# Altium PCB Synthdude.PcbDoc
Units mil, origin at the board's own origin, x right, y up, seen from the top; angles counter-clockwise.
Board outline 10550 x 5030 mil, 2 copper layers (Top Layer, Bottom Layer); 123 components, 120 nets, 857 pads, 55 vias.
Unrouted connection lines stored in the file: 258.
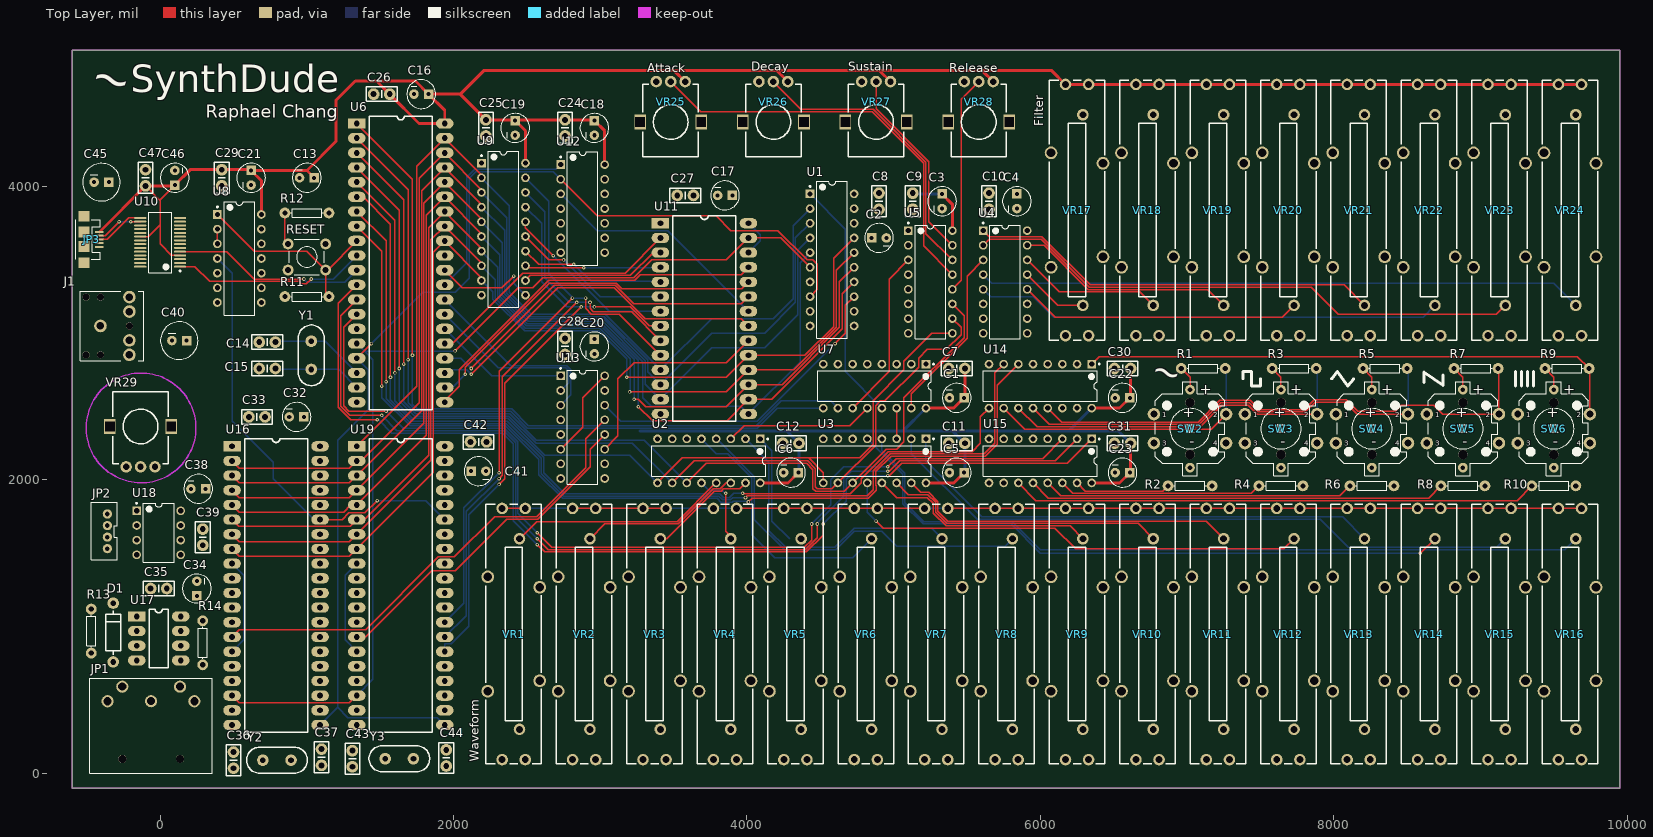
[diagram p0: Top Layer view]
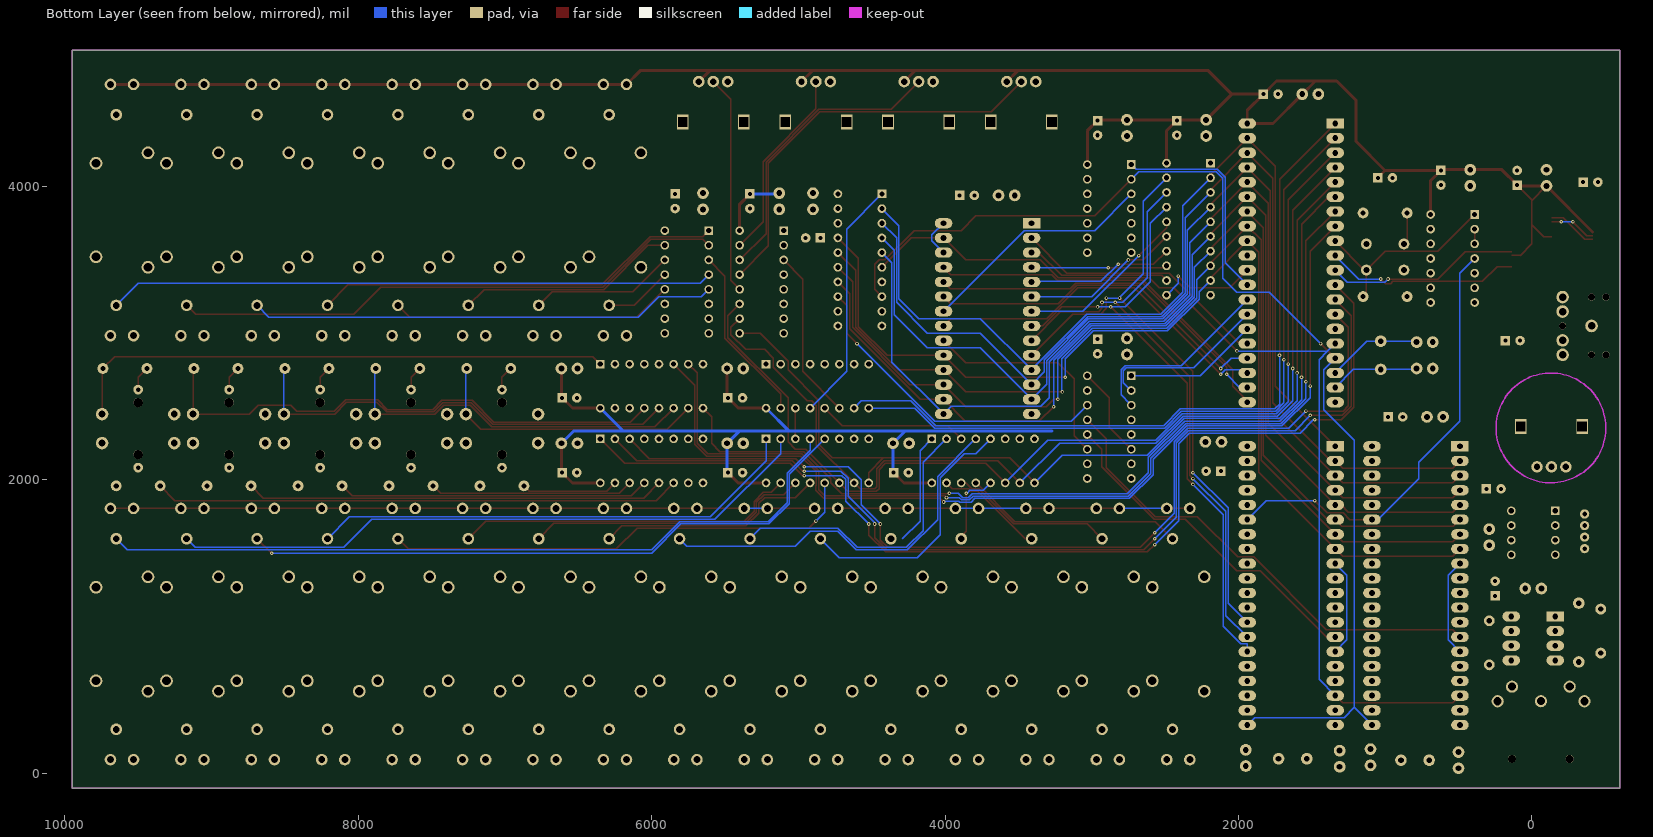
[diagram p1: Bottom Layer view, seen from below]

## Layer stack, top to bottom
Top Solder: solder mask 0.4, Solder Resist, Dk 3.5
Top Layer: signal copper 1.4
Dielectric 1: dielectric 12.6, FR-4, Dk 4.8
Bottom Layer: signal copper 1.4
Bottom Solder: solder mask 0.4, Solder Resist, Dk 3.5

## Board outline
-600,-100 9950,-100 9950,4930 -600,4930

## Design rules (kind name [scope] priority, off if disabled: settings)
Clearance [All] p1: gap=6
PolygonConnect [All] p1: connectstyle=Relief reliefconductorwidth=10 reliefentries=4 polygonreliefangle="90 Angle" airgapwidth=10
RoutingVias [All] p1: holewidth=12 width=24 viastyle="Through Hole" minholewidth=12 minwidth=24 maxholewidth=20 maxwidth=30
SolderMaskExpansion [All] p1: expansion=4
Width [All] p1: maxlimit=30 minlimit=10 preferedwidth=10
30 further rules are at their usual default settings.

## Classes and differential pairs
net class LED[0..4]: LED0 LED1 LED2 LED3 LED4
net class B[0..4]: B0 B1 B2 B3 B4
net class ADC[0..4]: ADC0 ADC1 ADC2 ADC3 ADC4
net class AD[0..7]: AD0 AD1 AD2 AD3 AD4 AD5 AD6 AD7
net class A[0..15]: A0 A1 A2 A3 A4 A5 A6 A7 A8 A9 A10 A11 A12 A13 A14 A15
component class U_USB: C45 C46 C47 JP3 U10
component class U_PSoC: C38 C39 C40 C41 C42 C43 C44 J1 JP2 U18 U19 VR29 Y3
component class U_MIDI: C32 C33 C34 C35 C36 C37 D1 JP1 R13 R14 U16 U17 Y2
component class U_MCU: C13 C14 C15 C16 C17 C18 C19 C20 C21 C22 C23 C24 C25 C26 C27 C28 C29 C30 C31 R11 R12 RESET U6 U8 U9 U11 U12 U13 U14 U15 Y1
component class U_Buttons: R1 R2 R3 R4 R5 R6 R7 R8 R9 R10 SW2 SW3 SW4 SW5 SW6
component class U_ADC: C1 C2 C3 C4 C5 C6 C7 C8 C9 C10 C11 C12 U1 U2 U3 U4 U5 U7 VR1 VR2 VR3 VR4 VR5 VR6 VR7 VR8 VR9 VR10 VR11 VR12 VR13 VR14 VR15 VR16 VR17 VR18 VR19 VR20 VR21 VR22 VR23 VR24 VR25 VR26 VR27 VR28

## Components (designator, comment, footprint, x,y, rotation, side; value= is the part's Value field where it differs from the comment)
C1 "10uF" CPOL-RADIAL 5430,2560 r0 top
C2 "10uF" CPOL-RADIAL 4900,3650 r180 top
C3 "10uF" CPOL-RADIAL 5330,3900 r90 top
C4 "10uF" CPOL-RADIAL 5840,3900 r90 top
C5 "10uF" CPOL-RADIAL 5430,2050 r0 top
C6 "10uF" CPOL-RADIAL 4300,2050 r0 top
C7 "0.1uF" CAP-PTH 5430,2760 r180 top
C8 "0.1uF" CAP-PTH 4900,3900 r270 top
C9 "0.1uF" CAP-PTH 5130,3900 r270 top
C10 "0.1uF" CAP-PTH 5650,3900 r270 top
C11 "0.1uF" CAP-PTH 5430,2250 r180 top
C12 "0.1uF" CAP-PTH 4300,2250 r180 top
C13 "10uF" CPOL-RADIAL 1000,4060 r0 top
C14 "33pF" CAP-PTH 730,2940 r180 top
C15 "33pF" CAP-PTH 730,2760 r180 top
C16 "10uF" CPOL-RADIAL 1780,4630 r0 top
C17 "10uF" CPOL-RADIAL 3850,3940 r0 top
C18 "10uF" CPOL-RADIAL 2960,4400 r90 top
C19 "10uF" CPOL-RADIAL 2420,4400 r90 top
C20 "10uF" CPOL-RADIAL 2960,2910 r90 top
C21 "10uF" CPOL-RADIAL 620,4060 r90 top
C22 "10uF" CPOL-RADIAL 6560,2560 r0 top
C23 "10uF" CPOL-RADIAL 6560,2050 r0 top
C24 "0.1uF" CAP-PTH 2760,4400 r270 top
C25 "0.1uF" CAP-PTH 2220,4400 r270 top
C26 "0.1uF" CAP-PTH 1510,4630 r180 top
C27 "0.1uF" CAP-PTH 3580,3940 r180 top
C28 "0.1uF" CAP-PTH 2760,2910 r270 top
C29 "0.1uF" CAP-PTH 420,4060 r270 top
C30 "0.1uF" CAP-PTH 6560,2760 r180 top
C31 "0.1uF" CAP-PTH 6560,2250 r180 top
C32 "10uF" CPOL-RADIAL 930,2430 r0 top
C33 "0.1uF" CAP-PTH 660,2430 r180 top
C34 "10uF" CPOL-RADIAL 250,1260 r270 top
C35 "0.1uF" CAP-PTH -10,1260 r180 top
C36 "33pF" CAP-PTH 500,90 r90 top
C37 "33pF" CAP-PTH 1100,110 r90 top
C38 "10uF" CPOL-RADIAL 260,1940 r0 top
C39 "0.1uF" CAP-PTH 290,1610 r90 top
C40 "100uF" CPOL-RADIAL-100UF-25V 130,2950 r0 top
C41 "10uF" CPOL-RADIAL 2170,2060 r180 top
C42 "0.1uF" CAP-PTH 2170,2260 r0 top
C43 "33pF" CAP-PTH 1310,100 r90 top
C44 "33pF" CAP-PTH 1950,105 r90 top
C45 "100uF" CPOL-RADIAL-100UF-25V -400,4030 r0 top
C46 "10uF" CPOL-RADIAL 100,4060 r270 top
C47 "0.1uF" CAP-PTH -100,4060 r90 top
D1 "IN4001" DIODE-1N4001 -320,960 r90 top
J1 "" AUDIO_JACK -406.85,3050 r0 top
JP1 "MIDI" DIN_5_FEMALE -80,350 r0 top
JP2 "PSoC" JST-PH-4-PTH-VERT -360,1650 r90 top
JP3 "USB" USB-MICROB -520,3640 r270 top
R1 "10K" RESISTOR 7110,2760 r0 top
R2 "470R" RESISTOR 7020,1960 r0 top
R3 "10K" RESISTOR 7730,2760 r0 top
R4 "470R" RESISTOR 7640,1960 r0 top
R5 "10K" RESISTOR 8350,2760 r0 top
R6 "470R" RESISTOR 8260,1960 r0 top
R7 "10K" RESISTOR 8970,2760 r0 top
R8 "470R" RESISTOR 8880,1960 r0 top
R9 "10K" RESISTOR 9590,2760 r0 top
R10 "470R" RESISTOR 9500,1960 r0 top
R11 "1K" RESISTOR 1000,3250 r0 top
R12 "100R" RESISTOR 1000,3820 r0 top
R13 "220R" RESISTOR -470,970 r90 top
R14 "270R" RESISTOR 290,890 r90 top
RESET "" TACTILE_SWITCH 1000,3520 r0 top
SW2 "Sine" TACTILE-PTH-LED 7020,2350 r0 top
SW3 "Square" TACTILE-PTH-LED 7640,2350 r0 top
SW4 "Triangle" TACTILE-PTH-LED 8260,2350 r0 top
SW5 "Sawtooth" TACTILE-PTH-LED 8880,2350 r0 top
SW6 "Arbitrary" TACTILE-PTH-LED 9500,2350 r0 top
U1 "ADC0820CCN" N20A 4580,3500 r0 top
U2 "CD4051BE" N0016A 3740,2130 r270 top
U3 "CD4051BE" N0016A 4870,2130 r270 top
U4 "CD4051BE" N0016A 5760,3350 r0 top
U5 "CD4051BE" N0016A 5250,3350 r0 top
U6 "AT89S52-24PU" PDIP-40 1340,4430 r0 top
U7 "CD4052BE" N0016A 4870,2640 r270 top
U8 "SN74LS14N" N0014A 540,3510 r0 top
U9 "SN74HC573AN" N0020A 2340,3710 r0 top
U10 "FT232RL" SSOP-28_N 0,3620 r180 top
U11 "AS6C6264-55PCN" PDIP-28 3410,3750 r0 top
U12 "SN74HC08N" N0014A 2880,3850 r0 top
U13 "SN74LS138N" N0016A 2880,2360 r0 top
U14 "CD4532BE" N0016A 6000,2640 r270 top
U15 "SN74LS138N" N0016A 6000,2130 r270 top
U16 "PC16550DN" PDIP-40 490,2230 r0 top
U17 "6N137" PDIP-8 -160,1070 r0 top
U18 "AD820ANZ" ADI-N-8 -10,1640 r0 top
U19 "PC16550DN" PDIP-40 1340,2230 r0 top
VR1 "10K" LINEAR_POT 2410,950 r270 top
VR2 "10K" LINEAR_POT 2890,950 r270 top
VR3 "10K" LINEAR_POT 3370,950 r270 top
VR4 "10K" LINEAR_POT 3850,950 r270 top
VR5 "10K" LINEAR_POT 4330,950 r270 top
VR6 "10K" LINEAR_POT 4810,950 r270 top
VR7 "10K" LINEAR_POT 5290,950 r270 top
VR8 "10K" LINEAR_POT 5770,950 r270 top
VR9 "10K" LINEAR_POT 6250,950 r270 top
VR10 "10K" LINEAR_POT 6730,950 r270 top
VR11 "10K" LINEAR_POT 7210,950 r270 top
VR12 "10K" LINEAR_POT 7690,950 r270 top
VR13 "10K" LINEAR_POT 8170,950 r270 top
VR14 "10K" LINEAR_POT 8650,950 r270 top
VR15 "10K" LINEAR_POT 9130,950 r270 top
VR16 "10K" LINEAR_POT 9610,950 r270 top
VR17 "10K" LINEAR_POT 6250,3840 r270 top
VR18 "10K" LINEAR_POT 6730,3840 r270 top
VR19 "10K" LINEAR_POT 7210,3840 r270 top
VR20 "10K" LINEAR_POT 7690,3840 r270 top
VR21 "10K" LINEAR_POT 8170,3840 r270 top
VR22 "10K" LINEAR_POT 8650,3840 r270 top
VR23 "10K" LINEAR_POT 9130,3840 r270 top
VR24 "10K" LINEAR_POT 9610,3840 r270 top
VR25 "10K" ROTARY_POT 3480,4440 r180 top
VR26 "10K" ROTARY_POT 4180,4440 r180 top
VR27 "10K" ROTARY_POT 4880,4440 r180 top
VR28 "10K" ROTARY_POT 5580,4440 r180 top
VR29 "10K" ROTARY_POT -133.66,2365 r0 top
Y1 "11.059MHz" CRYSTAL_PTH 1030,2850 r270 top
Y2 "2MHz" CRYSTAL_PTH 796.06,90 r180 top
Y3 "2MHz" CRYSTAL_PTH 1630,100 r180 top

## Footprints (in the part's own frame and the unit in brackets; to place one, negate y for a bottom-side part, rotate by r counter-clockwise, add the part's x,y. Pads: shape width x height; smd on the part's side, far side on the other; paste and mask are expansions set on the pad)
ADI-N-8 [mm] "DIP, 8-Leads, Body 9.59x6.6mm, Pitch 2.54mm"
  rect 1.5x1.5 hole 0.9: 1(-3.81,3.81)
  round 1.5 hole 0.9: 2(-3.81,1.27) 3(-3.81,-1.27) 4(-3.81,-3.81) 5(3.81,-3.81) 6(3.81,-1.27) 7(3.81,1.27) 8(3.81,3.81)
  silkscreen extent -3.93,-5.1 2.65,5.23, body extent -3.95,-5.07 3.95,5.07, height 5.33
AUDIO_JACK [mm]
  round 1.2 hole 1.2: 1(-2.5,-5) 1(-2.5,5) 1(0,-5) 1(0,5) 1(5,0)
  round 2.184 hole 1.3: RING(5,5) RSH(5,2.5) SLEEVE(0,0) TIP(5,-5) TSH(5,-2.5)
  silkscreen extent -3.5,-6 7.5,6
CAP-PTH [mil]
  round 80 hole 40: 1(-55,0) 2(55,0)
  silkscreen extent -105,-50 105,50
CPOL-RADIAL [mil]
  rect 65x65 hole 27.56: 1(50,0)
  round 65 hole 27.56: 2(-50,0)
  silkscreen extent -98,-98 98,98
CPOL-RADIAL-100UF-25V [mil]
  rect 65x65 hole 27.56: 1(50,0)
  round 65 hole 27.56: 2(-50,0)
  silkscreen extent -128,-128 128,128
CRYSTAL_PTH [mm]
  round 2 hole 1 mask+0: 1(-2.44,0) 2(2.44,0)
  silkscreen extent -5.25,-2.25 5.25,2.25
DIN_5_FEMALE [mm]
  round 1.4 hole 1.4: 1(-4.52,-6.38) 1(5.47,-6.38)
  round 2.1 hole 1.4: 1(7.94,3.6) 2(0.46,3.61) 3(-7.07,3.6) 4(5.47,6.13) 5(-4.53,6.12)
  silkscreen extent -10.16,-8.89 11.04,7.59
DIODE-1N4001 [mil]
  round 78 hole 40: A(-200,0) C(200,0)
  silkscreen extent -150,-50 150,50
JST-PH-4-PTH-VERT [mil]
  round 63 hole 31.5: 1(-118.11,0) 2(-39.37,0) 3(39.37,0) 4(118.37,0)
  silkscreen extent -195,-68 197,110, body extent -195,-67 195,110, height 236
LINEAR_POT [mm]
  round 2 hole 1.2 mask+0: 1(-21.75,-2) 1(-21.75,2) 2(-16.5,1) 2(16.5,1) 3(21.75,-2) 3(21.75,2)
  round 2.2 hole 1.5 mask+0: 4(-9.9,-4.5) 4(-8.1,4.5) 4(8.1,4.5) 4(9.9,-4.5)
  silkscreen extent -22.5,-4.8 22.5,4.8
N0014A [mm] "DIP, 14-Leads, Body 19.7x6.6mm, Pitch 2.54mm"
  rect 1.5x1.5 hole 0.9: 1(-3.81,7.62)
  round 1.5 hole 0.9: 2(-3.81,5.08) 3(-3.81,2.54) 4(-3.81,0) 5(-3.81,-2.54) 6(-3.81,-5.08) 7(-3.81,-7.62) 8(3.81,-7.62) 9(3.81,-5.08) 10(3.81,-2.54) 11(3.81,0) 12(3.81,2.54) 13(3.81,5.08) 14(3.81,7.62)
  silkscreen extent -3.93,-9.85 2.65,9.85, body extent -3.95,-9.85 3.95,9.85, height 5.08
N0016A [mm] "DIP, 16-Leads, Body 19.7x6.6mm, Pitch 2.54mm"
  rect 1.5x1.5 hole 0.9: 1(-3.81,8.89)
  round 1.5 hole 0.9: 2(-3.81,6.35) 3(-3.81,3.81) 4(-3.81,1.27) 5(-3.81,-1.27) 6(-3.81,-3.81) 7(-3.81,-6.35) 8(-3.81,-8.89) 9(3.81,-8.89) 10(3.81,-6.35) 11(3.81,-3.81) 12(3.81,-1.27) 13(3.81,1.27) 14(3.81,3.81) 15(3.81,6.35) 16(3.81,8.89)
  silkscreen extent -3.93,-9.85 2.65,10.32, body extent -3.95,-9.85 3.95,9.85, height 5.08
N20A [mm] "DIP, 20-Pin, Row Spacing 7.62 mm, Pitch 2.54 mm"
  rect 1.5x1.5 hole 0.9: 1(-3.81,11.43)
  round 1.5 hole 0.9: 2(-3.81,8.89) 3(-3.81,6.35) 4(-3.81,3.81) 5(-3.81,1.27) 6(-3.81,-1.27) 7(-3.81,-3.81) 8(-3.81,-6.35) 9(-3.81,-8.89) 10(-3.81,-11.43) 11(3.81,-11.43) 12(3.81,-8.89) 13(3.81,-6.35) 14(3.81,-3.81) 15(3.81,-1.27) 16(3.81,1.27) 17(3.81,3.81) 18(3.81,6.35) 19(3.81,8.89) 20(3.81,11.43)
  silkscreen extent -3.93,-13.6 2.65,13.6, body extent -3.3,-13.57 3.3,13.57, height 5.33
N0020A [mm] "DIP, 20-Leads, Body 26.9x6.6mm, Pitch 2.54mm"
  rect 1.5x1.5 hole 0.9: 1(-3.81,11.43)
  round 1.5 hole 0.9: 2(-3.81,8.89) 3(-3.81,6.35) 4(-3.81,3.81) 5(-3.81,1.27) 6(-3.81,-1.27) 7(-3.81,-3.81) 8(-3.81,-6.35) 9(-3.81,-8.89) 10(-3.81,-11.43) 11(3.81,-11.43) 12(3.81,-8.89) 13(3.81,-6.35) 14(3.81,-3.81) 15(3.81,-1.27) 16(3.81,1.27) 17(3.81,3.81) 18(3.81,6.35) 19(3.81,8.89) 20(3.81,11.43)
  silkscreen extent -3.93,-13.5 2.65,13.5, body extent -3.95,-13.45 3.95,13.45, height 5.08
PDIP-8 [mil]
  rect 120x70 hole 40: 1(0,0)
  oval 120x70 hole 40: 2(0,-100) 3(0,-200) 4(0,-300) 5(300,-300) 6(300,-200) 7(300,-100) 8(300,0)
  silkscreen extent 85,-350 215,50
PDIP-28 [mil]
  rect 120x70 hole 40: 1(0,0)
  oval 120x70 hole 40: 2(0,-100) 3(0,-200) 4(0,-300) 5(0,-400) 6(0,-500) 7(0,-600) 8(0,-700) 9(0,-800) 10(0,-900) 11(0,-1000) 12(0,-1100) 13(0,-1200) 14(0,-1300) 15(600,-1300) 16(600,-1200) 17(600,-1100) 18(600,-1000) 19(600,-900) 20(600,-800) 21(600,-700) 22(600,-600) 23(600,-500) 24(600,-400) 25(600,-300) 26(600,-200) 27(600,-100) 28(600,0)
  silkscreen extent 85,-1350 515,50
PDIP-40 [mil]
  rect 120x70 hole 40: 1(0,0)
  oval 120x70 hole 40: 2(0,-100) 3(0,-200) 4(0,-300) 5(0,-400) 6(0,-500) 7(0,-600) 8(0,-700) 9(0,-800) 10(0,-900) 11(0,-1000) 12(0,-1100) 13(0,-1200) 14(0,-1300) 15(0,-1400) 16(0,-1500) 17(0,-1600) 18(0,-1700) 19(0,-1800) 20(0,-1900) 21(600,-1900) 22(600,-1800) 23(600,-1700) 24(600,-1600) 25(600,-1500) 26(600,-1400) 27(600,-1300) 28(600,-1200) 29(600,-1100) 30(600,-1000) 31(600,-900) 32(600,-800) 33(600,-700) 34(600,-600) 35(600,-500) 36(600,-400) 37(600,-300) 38(600,-200) 39(600,-100) 40(600,0)
  silkscreen extent 85,-1950 515,50
RESISTOR [mil]
  round 74 hole 35.43: 1(-150,0) 2(150,0)
  silkscreen extent -110,-30 110,30
ROTARY_POT [mm]
  round 2 hole 1.1 mask+0: 1(-2.5,-7) 2(0,-7) 3(2.5,-7)
  rect 2x2.6 hole 1.6 square mask+0: 4(-5.3,0) 5(5.3,0)
  silkscreen extent -4.8,-6.5 4.8,6
SSOP-28_N [mm] "SOP, 28-Leads, Body 10.2x5.3mm, Pitch 0.65mm, IPC Medium Density"
  oval 2.1x0.35 smd: 1(-3.45,4.225) 2(-3.45,3.575) 3(-3.45,2.925) 4(-3.45,2.275) 5(-3.45,1.625) 6(-3.45,0.975) 7(-3.45,0.325) 8(-3.45,-0.325) 9(-3.45,-0.975) 10(-3.45,-1.625) 11(-3.45,-2.275) 12(-3.45,-2.925) 13(-3.45,-3.575) 14(-3.45,-4.225) 15(3.45,-4.225) 16(3.45,-3.575) 17(3.45,-2.925) 18(3.45,-2.275) 19(3.45,-1.625) 20(3.45,-0.975) 21(3.45,-0.325) 22(3.45,0.325) 23(3.45,0.975) 24(3.45,1.625) 25(3.45,2.275) 26(3.45,2.925) 27(3.45,3.575) 28(3.45,4.225)
  silkscreen extent -3.57,-5.25 2,5.25, body extent -2.8,-5.25 2.8,5.25, height 2
TACTILE-PTH-LED [mil]
  round 85 hole 47.24: 1(-246.06,98.43) 2(246.06,98.43) 3(-246.06,-98.43) 4(246.06,-98.43)
  round 62.99 hole 62.99: 1(0,-177.17) 1(0,177.17)
  round 66 hole 31.5: A(0,265.75) C(0,-265.75)
  silkscreen extent -236,-320 236,320
TACTILE_SWITCH [mil]
  round 74 hole 40: 1(-128,89) 2(128,89) 3(-128,-89) 4(128,-89)
  silkscreen extent -120,-120 120,120
USB-MICROB [mil]
  rect 14x56 smd: D+(0,105) D-(-25.59,105) GND(52,105) ID(26,105) VBUS(-51.18,105)
  rect 71x75 smd: MT1(-157.48,0) MT2(158,0)
  rect 75x75 smd: P$1(-50,0) P$2(50,0)
  silkscreen extent -134,-57 134,113, body extent -157,-98 157,115, height 112

## Part data
C1 C2 C3 C4 C5 C6 C13 C16 C17 C18 C19 C20 C21 C22 C23 C32 C34 C38 C41 C46: library part PolarizedCap
C7 C8 C9 C10 C11 C12 C14 C15 C24 C25 C26 C27 C28 C29 C30 C31 C33 C35 C36 C37 C39 C42 C43 C44 C47: library part Cap
C40 C45: library part PolarizedCap-100uF
J1: library part AudioJack
JP2: library part JST_PH_4_VERT
JP3: library part USB_MICROB_SMT
R1 R2 R3 R4 R5 R6 R7 R8 R9 R10 R11 R12 R13 R14: library part Resistor
RESET: library part Switch, "Switch, SPNO Push Button SMD"
SW2 SW3 SW4 SW5 SW6: library part SwitchLED
U1: library part CMP-0054-00020-2, "8-Bit High Speed uP Compatible A/D Converter with Track/Hold Function, 20-pin MDIP"
U2 U3 U4 U5: library part CMP-1575-00059-4, "CMOS Single 8-Channel Analog Multiplexer/Demultiplexer with Logic-Level Conversion, N0016A, TUBE"
U7: library part CMP-1575-00066-4, "CMOS Differential 4-Channel Analog Multiplexer/Demultiplexer with Logic-Level Conversion, N0016A, TUBE"
U8: library part CMP-1615-00069-3, "Hex schmitt-trigger inverters, N0014A, TUBE"
U9: library part CMP-1621-00367-2, "Octal Transparent D-Type Latches With 3-State Outputs, N0020A, TUBE"
U10: library part CMP-0078-00028-3, "USB UART Asynchronous Serial Data Transfer Chip, 28-pin SSOP, Tube"
U12: library part CMP-0777-00250-3, "Quadruple 2-Input Positive-AND Gates, N0014A, TUBE"
U13 U15: library part CMP-1633-00714-2, "3-line to 8-line decoder / demultiplexer, N0016A, TUBE"
U14: library part CMP-1633-00642-2, "CMOS 8-Bit Priority Encoder, N0016A, TUBE"
U18: library part CMP-0384-00229-1, "Single Channel Rail-to-Rail Operational Amplifier, 1.9 MHz BW, 3 V/us SR, Industrial, 8-pin DIP (N-8), Tube"
VR1 VR2 VR3 VR4 VR5 VR6 VR7 VR8 VR9 VR10 VR11 VR12 VR13 VR14 VR15 VR16 VR17 VR18 VR19 VR20 VR21 VR22 VR23 VR24: library part LinearPot
VR25 VR26 VR27 VR28 VR29: library part RotaryPot
Y1 Y2 Y3: library part Crystal

## Via types
v1: diameter 24, hole 12, Top Layer to Bottom Layer, 55 vias

## Nets (pads, with @x,y where several pads share a name; then routed paths per layer and width w, separated by ;. In a path a pad name is that pad's centre, name@x,y a point inside that pad or via, vN(x,y) a via of type N, cw(c..) or ccw(c..) an arc to the next point about the centre after c; other vN are vias at no path point)
5V: C1.1 C2.1 C3.1 C4.1 C5.1 C6.1 C7.1 C8.1 C9.1 C10.1 C11.1 C12.1 C13.1 C16.1 C17.1 C18.1 C19.1 C20.1 C21.1 C22.1 C23.1 C24.1 C25.1 C26.1 C27.1 C28.1 C29.1 C30.1 C31.1 C32.1 C33.1 C34.1 C35.1 C38.1 C39.1 C41.1 C42.1 C45.1 C46.1 C47.1 JP3.VBUS R1.1 R3.1 R5.1 R7.1 R9.1 R12.2 R14.2 SW2.A SW3.A SW4.A SW5.A SW6.A U1.12 U1.20 U2.16 U3.16 U4.16 U5.16 U6.31 U6.40 U7.16 U8.14 U9.20 U10.4 U10.20 U11.26 U11.28 U12.14 U13.6 U13.16 U14.5 U14.16 U15.6 U15.16 U16.12 U16.13 U16.40 U17.7 U17.8 U18.7 U19.12 U19.13 U19.40 VR1.1 VR2.1 VR3.1 VR4.1 VR5.1 VR6.1 VR7.1 VR8.1 VR9.1 VR10.1 VR11.1 VR12.1 VR13.1 VR14.1 VR15.1 VR16.1 VR17.1 VR18.1 VR19.1 VR20.1 VR21.1 VR22.1 VR23.1 VR24.1 VR25.1 VR26.1 VR27.1 VR28.1 | length 31143
  Top Layer w10: U10.20 -81.61,3658.39 0,3740 ; C47.1 0,3905 ; C46.1 95,4005 0,3910 0,3905 ; U10.4 80.43,3530.43 80,3530 0,3610 0,3740 ; VR1.1@2331.26,1806.3 VR1.1@2488.74,1806.3 ; U13.6 2880,2360 2880,2560 U13.16 ; VR2.1@2811.26,1806.3 VR3.1@3448.74,1806.3 ; VR4.1@3928.74,1806.3 VR7.1@5211.26,1806.3 ; VR7.1@5368.74,1806.3 VR16.1@9688.74,1806.3 ; C5.1 C5.1@5485,2055 ; C1.1 C1.1@5485,2565 ; C23.1 C23.1@6615,2055 ; C22.1 C22.1@6615,2565 ; R1.1 7020,2700 SW2.A ; R3.1 7640,2700 SW3.A ; R5.1 8260,2700 SW4.A ; R7.1 8880,2700 SW5.A ; R9.1 9500,2700 SW6.A ; 0,3740 0,3905
  Top Layer w20: JP3.VBUS -413.82,3691.18 C47.1 C46.1@95,4005 ; C46.1 205,4115 C29.1 615,4115 C21.1 ; U8.14 690,4040 C21.1 ; C13.1 1000,4110 ; U9.20 2490,4380 C19.1 ; U12.14 3030,4380 C18.1 2955,4455 C24.1 2425,4455 C19.1 ; VR25.1 3504.02,4790 ; U2.16 4280,1980 C6.1 ; VR26.1 4204.02,4790 ; VR27.1 4904.02,4790 ; U3.16 5410,1980 C5.1 ; U7.16 5410,2490 C1.1 ; C3.1 5400,3880 U5.16 ; C1.1@5485,2565 C7.1 ; VR28.1 5604.02,4790 ; U15.16 6540,1980 C23.1 ; U14.16 6540,2490 C22.1 ; C23.1@6615,2055 C31.1 ; C22.1@6615,2565 C30.1 ; VR24.1@9688.74,4696.3 9531.26,4696.3 9208.74,4696.3 9051.26,4696.3 8728.74,4696.3 8571.26,4696.3 8248.74,4696.3 8091.26,4696.3 7768.74,4696.3 7611.26,4696.3 7288.74,4696.3 7131.26,4696.3 6808.74,4696.3 6651.26,4696.3 6328.74,4696.3 6171.26,4696.3 6077.56,4790 5604.02,4790 ; C21.1 1000,4110 ; 1000,4110 1200,4310 1200,4590 1330,4720 1475,4720 ; 1475,4720 1740,4720 C16.1 ; 1475,4720 C26.1 1765,4430 U6.40 1940,4520 C16.1 ; C16.1 2045,4630 ; 2045,4630 2205,4790 3504.02,4790 ; 2045,4630 C25.1 2415,4455 C19.1 ; 3504.02,4790 4204.02,4790 ; 4204.02,4790 4904.02,4790 ; 4904.02,4790 5604.02,4790
  Bottom Layer w10: VR1.1@2488.74,1806.3 VR2.1@2811.26,1806.3 ; VR3.1@3448.74,1806.3 VR4.1@3928.74,1806.3 ; U11.26 4090,3630 4090,3670 U11.28 ; C6.1 C6.1@4355,2055 ; C9.1 C9.1@5135,3950 ; VR7.1@5211.26,1806.3 VR7.1@5368.74,1806.3
  Bottom Layer w20: 3270,2332.47 4272.53,2332.47 ; C6.1@4355,2055 C12.1 4272.53,2332.47 ; C9.1@5135,3950 C3.1 ; U7.16 5062.47,2332.47 ; C5.1 5485,2055 C11.1 5402.53,2332.47 ; U14.16 6192.47,2332.47 ; C31.1 6532.53,2332.47 6192.47,2332.47 ; 4272.53,2332.47 5062.47,2332.47 ; 5062.47,2332.47 5402.53,2332.47 ; 5402.53,2332.47 6192.47,2332.47
A0: U9.19 U11.10 U16.28 U19.28 | length 4325.5
  Top Layer w10: v1(2310,2050) 2310,2740 v1(2810,3240) ; v1(2900,3240) 2900,3170 2939,3131 3129,3131 U11.10
  Bottom Layer w10: U19.28 2070,1160 2070,1810 v1(2310,2050) ; U9.19 2650,3900 2650,3405.25 2810,3245.25 v1(2810,3240) v1(2900,3240)
A1: U9.18 U11.9 U16.27 U19.27 | length 4292.3
  Top Layer w10: v1(2310,2010) 2333,2033 2333,2703 v1(2840,3210) ; v1(2930,3210) 2930,3170 2953,3147 3213,3147 U11.9
  Bottom Layer w10: U19.27 2086,1076 2086,1786 v1(2310,2010) ; U9.18 2620,3830 2620,3380 2790,3210 v1(2840,3210) 2920,3210 2930,3200 v1(2930,3210)
A2: U9.17 U11.8 U16.26 U19.26 | length 4254.9
  Top Layer w10: v1(2310,1970) 2349,2009 2349,2659 v1(2870,3180) ; v1(2960,3180) 3202.63,3180 3332.63,3050 U11.8
  Bottom Layer w10: U19.26 1940,884 1984.05,884 2102,1001.95 2102,1762 v1(2310,1970) ; U9.17 2600,3750 2600,3350 2770,3180 v1(2870,3180) v1(2960,3180) v1@2964,3180
A3: U9.16 U11.7 | length 1196.1
  Top Layer w10: U9.16 2490,3720 v1(2680,3530)
  Bottom Layer w10: v1(2680,3530) 3060,3150 U11.7
A4: U9.15 U11.6 | length 1089.8
  Top Layer w10: U9.15 2650,3500 v1(2750,3500)
  Bottom Layer w10: v1(2750,3500) 3000,3250 U11.6
A5: U9.14 U11.5 | length 1008.7
  Top Layer w10: U9.14 2580,3470 v1(2820,3470)
  Bottom Layer w10: v1(2820,3470) 2937,3353 3410,3353 U11.5
A6: U9.13 U11.4 | length 926.6
  Top Layer w10: U9.13 2503,3447 v1(2887,3447)
  Bottom Layer w10: v1(2887,3447) 3407,3447 U11.4
A7: U9.12 U11.3 | length 998.7
  Top Layer w10: U9.12 2524,3394 3204,3394 3360,3550 U11.3
A8: U6.21 U11.25 | length 2522.9
  Top Layer w10: U6.21 1940,2540 1984,2584 1984.05,2584 2011,2610.95 2011,2611 2040,2640 2040,2752.63 2649.37,3362 3234.63,3362 3272.63,3400 3960,3400 U11.25
A9: U6.22 U11.24 | length 2469
  Top Layer w10: U6.22 U6.22@1980,2630 ; v1(2080,2720) 2080,2770 2652,3342 3108.51,3342 3146.51,3304 3964,3304 U11.24
  Bottom Layer w10: U6.22 1990,2630 v1(2080,2720)
A10: U6.23 U11.21 | length 2471.1
  Top Layer w10: U6.23 U6.23@1960,2750 ; v1(2120,2720) 2710,3310 3095.25,3310 3305.25,3100 3960,3100 U11.21
  Bottom Layer w10: U6.23 1960,2750 2090,2750 v1(2120,2720)
A11: U6.24 U11.23 | length 2406.3
  Top Layer w10: v1(2120,2760) 2686,3326 3101.88,3326 3227.88,3200 3960,3200 U11.23
  Bottom Layer w10: U6.24 2050,2830 v1(2120,2760)
A12: U6.25 U11.2 | length 1768.2
  Top Layer w10: U6.25 1990,2930 2470,3410 3170,3410 U11.2
A13: U6.26 U13.1 | length 926.7
  Bottom Layer w10: U6.26 2260,2710 2720,2710 U13.1@2730,2720
A14: U6.27 U13.2 | length 1155.7
  Bottom Layer w10: U6.27 2306,2764 2763.37,2764 2784,2743.37 2784,2664 2740,2620 U13.2@2730,2620
A15: U6.28 U13.3 | length 1323.7
  Bottom Layer w10: U6.28 2390,2780 2770,2780 2800,2750 2800,2580 2740,2520 U13.3@2730,2520
AD0: U1.2 U6.39 U9.2 U11.11 U16.1 U19.1 | length 6601.9
  Top Layer w10: U19.1 1750,2640 1750,4140 U6.39 2190,4080 U9.2
  Bottom Layer w10: U9.2 2380,3870 2380,3280 2530,3130 3035.25,3130 3410,2755.25 U11.11 3760,3100 4180,3100 4314,3234 4314,3734 U1.2
AD1: U1.3 U6.38 U9.3 U11.12 U16.2 U19.2 | length 7475.8
  Top Layer w10: U16.2 540,2080 1290,2080 U19.2 1370,2130 1766,2526 1766,4056 U6.38 2190,3980 U9.3
  Bottom Layer w10: U9.3 2364,3786 2364,3273.37 2523.37,3114 3028.63,3114 3322,2820.63 3322,2738 U11.12 3760,3000 4120,3000 4330,3210 4330,3650 U1.3
AD2: U1.4 U6.37 U9.4 U11.13 U16.3 U19.3 | length 7458.2
  Top Layer w10: U16.3 540,1980 1290,1980 U19.3 1782,2472 1782,3972 U6.37 2190,3880 U9.4
  Bottom Layer w10: U9.4 2348,3702 2348,3266.75 2516.75,3098 3022,3098 3306,2814 3306,2654 U11.13 3760,2900 4120,2900 4346,3126 4346,3566 U1.4
AD3: U1.5 U6.36 U9.5 U11.15 U16.4 U19.4 | length 7604.6
  Top Layer w10: U16.4 540,1880 1290,1880 U19.4 1798,2388 1798,3888 U6.36 2190,3780 U9.5
  Bottom Layer w10: U9.5 2332,3618 2332,3260.12 2510.12,3082 3015.37,3082 3290,2807.37 3290,2560 3346,2504 3956,2504 U11.15 4362,2802 4362,3482 U1.5
AD4: U1.14 U6.35 U9.6 U11.16 U16.5 U19.5 | length 7554.9
  Top Layer w10: U16.5 540,1780 1250,1780 1300,1830 U19.5 1814,2304 1814,3804 U6.35 2190,3680 U9.6 ; v1(3260,2500) 3356,2404 3864,2404 U11.16 4170,2550 4650,3030 4650,3270 U1.14
  Bottom Layer w10: U9.6 2316,3534 2316,3253.49 2503.49,3066 3008.75,3066 3260,2814.75 v1(3260,2500)
AD5: U1.15 U6.34 U9.7 U11.17 U16.6 U19.6 | length 7472
  Top Layer w10: U16.6 536,1684 1294,1684 U19.6 1390,1730 1830,2170 1830,3720 U6.34 2190,3580 U9.7 ; v1(3230,2550) 3260,2550 3310,2500 3860,2500 U11.17 4240,2650 4630,3040 4630,3350 U1.15
  Bottom Layer w10: U9.7 2300,3450 2300,3246.86 2496.86,3050 3002.12,3050 3230,2822.12 v1(3230,2550)
AD6: U1.16 U6.33 U9.8 U11.18 U16.7 U19.7 | length 7340.7
  Top Layer w10: U16.7 540,1580 1290,1580 U19.7 1846,2136 1846,3636 U6.33 2190,3480 U9.8 ; v1(3200,2600) 3860,2600 U11.18 4317.37,2750 4610,3042.63 4610,3430 U1.16
  Bottom Layer w10: U9.8 2284,3366 2284,3240.24 2490.24,3034 2995.49,3034 3203,2826.49 3203,2603 v1(3200,2600)
AD7: U1.17 U6.32 U9.9 U11.19 U16.8 U19.8 | length 7195.3
  Top Layer w10: U16.8 540,1480 1290,1480 U19.8 1862,2052 1862,3552 U6.32 2190,3380 U9.9 ; v1(3180,2700) 3860,2700 U11.19 4394.75,2850 4590,3045.25 4590,3510 U1.17
  Bottom Layer w10: U9.9 2268,3282 2268,3233.61 2483.61,3018 2988.86,3018 3180,2826.86 v1(3180,2700)
ADC0: U6.1 U7.10 | length 5122.8
  Top Layer w10: U6.1 1720,4050 v1(1720,2850)
  Bottom Layer w10: v1(1720,2850) 1720,2517.88 1753.88,2484 2396,2484 2510.53,2369.47 2746.79,2369.47 2747.31,2370 3012.69,2370 3013.21,2369.47 4062.1,2369.47 4232.63,2540 4570,2540 U7.10
ADC1: U6.2 U7.9 | length 4907.4
  Top Layer w10: U6.2 1690,3980 v1(1690,2820)
  Bottom Layer w10: v1(1690,2820) 1690,2525.25 1747.25,2468 2389.37,2468 2503.9,2353.47 4068.73,2353.47 4205.25,2490 U7.9
ADC2: U2.11 U3.11 U4.11 U5.11 U6.3 | length 6961.8
  Top Layer w10: U6.3 1660,3910 v1(1660,2790) ; U2.11 3724,2114 4406,2114 4450,2070 4450,1941.37 4467.9,1923.47 4663.47,1923.47 U3.11 4950,2210 5020,2210 5070,2260 5070,2560 5480,2970 5480,3120 U5.11
  Bottom Layer w10: v1(1660,2790) 1660,2532.63 1740.63,2452 2382.75,2452 2565.27,2269.47 2746.79,2269.47 2747.31,2270 3012.69,2270 3013.21,2269.47 3046.79,2269.47 3047.31,2270 3300,2270 U2.11
ADC3: U2.10 U3.10 U4.10 U5.10 U6.4 | length 6749.1
  Top Layer w10: U6.4 1630,3840 v1(1630,2760) ; U2.10 3640,2130 4412.63,2130 4466,2076.63 4466,1954 4480.53,1939.47 4579.47,1939.47 U3.10 4876.53,2236.53 4876.53,2506.53 4910,2540 4940,2540 5170,2770 5170,2830 5230,2890 5360,2890 5460,2990 5460,3040 U5.10
  Bottom Layer w10: v1(1630,2760) 1630,2540 1734,2436 2376.12,2436 2562.12,2250 2712.69,2250 2713.21,2250.53 2746.79,2250.53 2747.31,2250 3012.69,2250 3013.21,2250.53 3219.47,2250.53 U2.10
ADC4: U2.9 U3.9 U4.9 U5.9 U6.5 | length 6473.8
  Top Layer w10: U6.5 1600,3770 v1(1600,2730) ; U2.9 3560,2150 4420,2150 ; U3.9 4520,2050 4420,2150 ; U5.9 5260,3000 5070,2810 5070,2750 4860.53,2540.53 4860.53,2243.16 4767.37,2150 4420,2150
  Bottom Layer w10: v1(1600,2730) 1600,2540 1720,2420 2369.49,2420 2620.02,2169.47 2746.79,2169.47 2747.31,2170 3012.69,2170 3013.21,2169.47 3046.79,2169.47 3047.31,2170 3200,2170 U2.9
ALE: U6.30 U9.11 | length 716
  Top Layer w10: U6.30 2060,3310 2330,3310 v1(2410,3390)
  Bottom Layer w10: v1(2410,3390) 2410,3340 U9.11
B0: R1.2 SW2.2 U14.10 | length 1931.4
  Top Layer w10: U14.10 5893.07,2346.93 7164.56,2346.93 SW2.2
  Bottom Layer w10: R1.2 7266.06,2753.94 SW2.2
B1: R3.2 SW3.2 U14.11 | length 2489.2
  Top Layer w10: U14.11 5977.07,2362.93 7088.18,2362.93 7235.25,2510 7417.37,2510 7478.94,2448.43 SW3.2
  Bottom Layer w10: R3.2 7886.06,2753.94 SW3.2
B2: R5.2 SW4.2 U14.12 | length 3063.5
  Top Layer w10: U14.12 6061.07,2378.93 7081.56,2378.93 7228.63,2526 7424,2526 7485.57,2464.43 7807.06,2464.43 7872.63,2530 8080,2530 8161.57,2448.43 SW4.2
  Bottom Layer w10: R5.2 8506.06,2753.94 SW4.2
B3: R7.2 SW5.2 U14.13 | length 3616.7
  Top Layer w10: U14.13 6145.07,2394.93 7074.93,2394.93 7222,2542 7430.63,2542 7492.2,2480.43 7800.43,2480.43 7866,2546 8086.63,2546 8162.63,2470 8420,2470 8460,2510 8680,2510 8741.57,2448.43 SW5.2 9126.06,2753.94 R7.2
B4: R9.2 SW6.2 U14.1 | length 3757.9
  Top Layer w10: U14.1 6400,2840 9660,2840 R9.2 9746.06,2753.94 SW6.2
CE: U11.20 U13.11 | length 1515
  Top Layer w10: U13.11 3120,2300 3120,2690 3230,2800 3860,2800 U11.20
GND: C1.2 C2.2 C3.2 C4.2 C5.2 C6.2 C7.2 C8.2 C9.2 C10.2 C11.2 C12.2 C14.2 C15.2 C16.2 C17.2 C18.2 C19.2 C20.2 C21.2 C22.2 C23.2 C24.2 C25.2 C26.2 C27.2 C28.2 C29.2 C30.2 C31.2 C32.2 C33.2 C34.2 C35.2 C36.2 C37.2 C38.2 C39.2 C41.2 C42.2 C43.2 C44.2 C45.2 C46.2 C47.2 J1.SLEEVE JP2.1 JP3.GND JP3.MT1 R11.1 SW2.4 SW3.4 SW4.4 SW5.4 SW6.4 U1.7 U1.10 U1.11 U2.6 U2.7 U2.8 U3.6 U3.7 U3.8 U4.6 U4.7 U4.8 U5.6 U5.7 U5.8 U6.20 U7.6 U7.7 U7.8 U8.7 U9.1 U9.10 U10.7 U10.18 U10.21 U10.25 U10.26 U11.14 U12.7 U13.4 U13.5 U13.8 U14.8 U15.4 U15.5 U15.8 U16.19 U16.20 U16.22 U16.25 U17.5 U18.4 U19.19 U19.20 U19.22 U19.25 VR1.3 VR2.3 VR3.3 VR4.3 VR5.3 VR6.3 VR7.3 VR8.3 VR9.3 VR10.3 VR11.3 VR12.3 VR13.3 VR14.3 VR15.3 VR16.3 VR17.3 VR18.3 VR19.3 VR20.3 VR21.3 VR22.3 VR23.3 VR24.3 VR25.3 VR26.3 VR27.3 VR28.3 VR29.3
L0: U6.12 U15.1 | length 7186.8
  Top Layer w10: U6.12 1214,3204 1214,2496 1300,2410 v1(1480,2410) ; v1(2570,1560) 2620,1510 4405.25,1510 4520,1624.75 v1(4520,1700) ; v1(4960,2030) 4970,2030 5054,2114 6184,2114 U15.1
  Bottom Layer w10: v1(1480,2410) 1490,2410 1580,2320 2333.73,2320 2406.37,2247.36 2406.37,1723.63 v1(2570,1560) ; v1(4520,1700) 4676.53,1856.53 4676.53,2003.9 4702.63,2030 v1(4960,2030)
L1: U6.13 U15.2 | length 6936.8
  Top Layer w10: U6.13 1230,3120 1230,2502.63 1292.63,2440 v1(1510,2440) ; v1(2570,1600) 2644,1526 4398.63,1526 4480,1607.37 v1(4480,1700) ; v1(4960,2060) 4970,2060 5040,2130 6100,2130 U15.2
  Bottom Layer w10: v1(1510,2440) 1614,2336 2340.35,2336 2422.37,2253.98 2422.37,1747.63 v1(2570,1600) ; v1(4480,1700) 4480,1707.37 4660.53,1887.9 4660.53,2010.53 4710,2060 v1(4960,2060)
L2: U6.14 U15.3 | length 6717.2
  Top Layer w10: U6.14 1250,3040 1250,2505.25 1285.25,2470 v1(1540,2470) ; v1(2570,1640) 2668,1542 4392,1542 4440,1590 v1(4440,1700) ; v1(4960,2090) 5016,2146 6016,2146 U15.3
  Bottom Layer w10: v1(1540,2470) 1658,2352 2346.98,2352 2438.37,2260.61 2438.37,1771.63 v1(2570,1640) ; v1(4440,1700) 4570,1830 4570,2000 4660,2090 v1(4960,2090)
LED0: R2.1 U15.15 | length 658.1
  Top Layer w10: U15.15 6306,1924 6834,1924 R2.1
LED1: R4.1 U15.14 | length 1391.4
  Top Layer w10: U15.14 6222,1908 7438,1908 R4.1
LED2: R6.1 U15.13 | length 2124.6
  Top Layer w10: U15.13 6138,1892 8042,1892 R6.1
LED3: R8.1 U15.12 | length 2857.9
  Top Layer w10: U15.12 6054,1876 8646,1876 R8.1
LED4: R10.1 U15.11 | length 3591.1
  Top Layer w10: U15.11 5970,1860 9250,1860 R10.1
NetC13_2: C13.2 R11.2 RESET.4 U6.9 U8.1 | length 1379.5
  Top Layer w10: U8.1 640,3560 999,3560 RESET.4 ; R11.2 1128,3272 RESET.4 ; U6.9 1141,3431 RESET.4
NetC14_1: C14.1 U6.18 Y1.1 | length 647
  Bottom Layer w10: C14.1 791.06,2946.06 Y1.1 1123.94,2946.06 U6.18
NetC15_1: C15.1 U6.19 Y1.2 | length 608.8
  Bottom Layer w10: C15.1 791.06,2753.94 Y1.2 1216.06,2753.94 U6.19
NetC36_1: C36.1 U16.16 Y2.1
NetC37_1: C37.1 U16.17 Y2.2
NetC40_1: C40.1 U18.2 U18.6
NetC40_2: C40.2 J1.RING J1.TIP
NetC43_1: C43.1 U19.16 Y3.1
NetC44_1: C44.1 U19.17 Y3.2
NetD1_A: D1.A JP1.5 U17.3
NetD1_C: D1.C R13.2 U17.2
NetJP1_4: JP1.4 R13.1
NetJP2_2: JP2.2 U19.11
NetJP2_3: JP2.3 U19.10
NetJP2_4: JP2.4 VR29.1
NetJP3_2: JP3.D- U10.16 | length 318.6
  Top Layer w10: JP3.D- -374.41,3665.59 v1(-280,3760) ; v1(-200,3760) -199.25,3760.75 U10.16
  Bottom Layer w10: v1(-280,3760) v1(-200,3760)
NetJP3_3: JP3.D+ U10.15 | length 339.8
  Top Layer w10: JP3.D+ -360,3640 -213.66,3786.34 U10.15
NetR2_2: R2.2 SW2.C
NetR4_2: R4.2 SW3.C
NetR6_2: R6.2 SW4.C
NetR8_2: R8.2 SW5.C
NetR10_2: R10.2 SW6.C
NetR12_1: R12.1 RESET.1 | length 220.1
  Top Layer w10: R12.1 850,3631 RESET.1
NetR14_1: R14.1 U16.10 U17.6
NetU1_1: U1.1 U7.13 | length 1663
  Bottom Layer w10: U1.1 4670,3710 4670,2740 U7.13
NetU1_13: U1.13 U13.14 | length 2208.9
  Top Layer w10: v1(4600,2930) 4670,3000 4670,3190 U1.13
  Bottom Layer w10: U13.14 3140,2400 4070,2400 v1(4600,2930)
NetU2_1: U2.1 VR5.2 | length 763.5
  Bottom Layer w10: U2.1 4170,2200 4170,1720.24 4290.63,1599.61
NetU2_2: U2.2 VR7.2 | length 2003.1
  Bottom Layer w10: U2.2 4150,2120 4150,1652.63 4262.63,1540 4600,1540 4730,1670 5260,1670 VR7.2@5330,1600
NetU2_3: U2.3 U7.12 | length 1017
  Top Layer w10: U2.3 3980,2370 4700,2370 U7.12
NetU2_4: U2.4 VR8.2 | length 2618.9
  Bottom Layer w10: U2.4 3792.63,2280 4049.47,2023.16 4049.47,1730.53 4256,1524 4606.63,1524 4732.63,1650 4920,1650 5020,1550 5760,1550 VR8.2@5810,1600
NetU2_5: U2.5 VR6.2 | length 1777.8
  Bottom Layer w10: U2.5 3790,2180 3870,2180 4033.47,2016.53 4033.47,1626.53 4190,1470 4720,1470 VR6.2@4850,1600
NetU2_12: U2.12 VR4.2 | length 521.1
  Top Layer w10: v1(3855,1910) 3855,1650 3890,1615 VR4.2@3890,1600
  Bottom Layer w10: U2.12@3690,1977.37 U2.12 3740,1930 3830,1930 3850,1910 v1(3855,1910)
NetU2_13: U2.13 VR1.2 | length 1497.4
  Top Layer w10: VR1.2@2450,1600 2566,1716 3523.37,1716 3787.37,1980 U2.13
NetU2_14: U2.14 VR2.2 | length 1117.4
  Top Layer w10: VR2.2@2930,1600 3030,1700 3530,1700 3769.47,1939.47 3816.85,1939.47 3857.37,1980 U2.14
NetU2_15: U2.15 VR3.2 | length 737.4
  Top Layer w10: VR3.2@3410,1600 3452.63,1600 3776.1,1923.47 3823.47,1923.47 3839.47,1939.47 3949.47,1939.47 U2.15
NetU3_1: U3.1 VR13.2 | length 3359.1
  Bottom Layer w10: U3.1 5220,2130 5602,1748 8060.98,1748 VR13.2@8209.37,1599.61
NetU3_2: U3.2 VR15.2 | length 4439.2
  Bottom Layer w10: U3.2 5120,2180 5568,1732 7908,1732 8100,1540 9109.76,1540 VR15.2@9169.37,1599.61
NetU3_3: U3.3 U7.14 | length 210
  Top Layer w10: U3.3 U7.14
NetU3_4: U3.4 VR16.2 | length 5236.3
  Bottom Layer w10: U3.4 4920,2202.63 5076.53,2046.1 5076.53,1846.1 5206.63,1716 5806.63,1716 5998.63,1524 9573.76,1524 VR16.2@9649.37,1599.61
NetU3_5: U3.5 VR14.2 | length 4351.7
  Top Layer w10: v1(8590,1500) VR14.2@8690,1600
  Bottom Layer w10: U3.5 5060.53,2039.47 5060.53,1839.47 5200,1700 5800,1700 6000,1500 v1(8590,1500)
NetU3_12: U3.12 VR12.2 | length 3241.8
  Top Layer w10: v1(4880,1720) 4928,1672 6098,1672 6240,1530 7659.76,1530 VR12.2@7729.37,1599.61
  Bottom Layer w10: U3.12 4820,1780 v1(4880,1720)
NetU3_13: U3.13 VR9.2 | length 1565.6
  Top Layer w10: U3.13 5020,1880 5230,1880 5270,1840 5270,1774.75 5356.75,1688 6202,1688 VR9.2@6290,1600
NetU3_14: U3.14 VR10.2 | length 1945.6
  Top Layer w10: U3.14 5100,1900 5232.63,1900 5286,1846.63 5286,1781.37 5363.37,1704 6666,1704 VR10.2@6770,1600
NetU3_15: U3.15 VR11.2 | length 2325.6
  Top Layer w10: U3.15 5184,1916 5239.25,1916 5302,1853.25 5302,1788 5370,1720 7130,1720 VR11.2@7250,1600
NetU4_1: U4.1 VR21.2 | length 2810.5
  Top Layer w10: U4.1 5650.53,3659.47 6010.53,3659.47 6340,3330 8069.76,3330 VR21.2@8209.37,3190.39
NetU4_2: U4.2 VR23.2 | length 3812.6
  Top Layer w10: U4.2 5650.53,3640.53 6006.85,3640.53 6333.37,3314 7846,3314 8030,3130 9108.98,3130 VR23.2@9169.37,3190.39
NetU4_3: U4.3 U7.15 | length 1213
  Top Layer w10: U7.15 5120,2587.37 5500,2967.37 5500,3390 U4.3
NetU4_4: U4.4 VR24.2 | length 4126.2
  Bottom Layer w10: U4.4 5669.47,3340.53 9499.24,3340.53 VR24.2@9649.37,3190.39
NetU4_5: U4.5 VR22.2 | length 3191.4
  Bottom Layer w10: U4.5 5660,3250 5950,3250 6090,3110 8608.98,3110 VR22.2@8689.37,3190.39
NetU4_12: U4.12 VR20.2 | length 1931.4
  Top Layer w10: U4.12 6100,3110 7648.98,3110 VR20.2@7729.37,3190.39
NetU4_13: U4.13 VR17.2 | length 466.2
  Top Layer w10: U4.13 6119.61,3190.39 VR17.2@6289.37,3190.39
NetU4_14: U4.14 VR18.2 | length 987.6
  Top Layer w10: U4.14 6128,3282 6677.76,3282 VR18.2@6769.37,3190.39
NetU4_15: U4.15 VR19.2 | length 1509
  Top Layer w10: U4.15 6024.75,3600 6326.75,3298 7141.76,3298 VR19.2@7249.37,3190.39
NetU5_3: U5.3 U7.11 | length 1167.4
  Top Layer w10: U7.11 4970,2740 4970,3370 U5.3
NetU5_12: U5.12 VR28.2 | length 1490.1
  Top Layer w10: U5.12 5460,3360 5460,4595.59 VR28.2
NetU5_13: U5.13 VR25.2 | length 2795.8
  Top Layer w10: VR25.2 3684.22,4511.37 4853.37,4511.37 5204,4160.75 5204,3596 U5.13
NetU5_14: U5.14 VR26.2 | length 2009
  Top Layer w10: VR26.2 4368.22,4527.37 4860,4527.37 5220,4167.37 5220,3680 U5.14
NetU5_15: U5.15 VR27.2 | length 1331
  Top Layer w10: VR27.2 4880,4530 5240,4170 5240,3760 U5.15
NetU6_10: U6.10 U10.1 | length 1332.4
  Top Layer w10: U10.1 236.34,3453.66 336.53,3353.47 946.53,3353.47 963,3337 997,3337 v1(1030,3370)
  Bottom Layer w10: v1(1030,3370) 1180,3370 U6.10
NetU6_11: U6.11 U10.5 | length 1325.6
  Top Layer w10: U10.5 453.98,3556.02 640.53,3369.47 706.79,3369.47 707.31,3370 v1(980,3370)
  Bottom Layer w10: v1(980,3370) 1003,3347 1257,3347 U6.11
NetU8_2: U8.2 U8.3 | length 100
  Top Layer w10: U8.3 U8.2
NetU8_4: U8.4 U16.35 U19.35 | length 3055.1
  Top Layer w10: U16.35 1240,1730 1286,1776 1396,1776 v1(1480,1860)
  Bottom Layer w10: U8.4 490,3410 490,2400 770,2120 770,2010 U16.35@1050,1730 ; U16.35@1045.95,1730 U16.35@1050,1730 ; U16.35 U16.35@1050,1730 ; v1(1480,1860) 1810,1860 U19.35
NetU13_12: U13.12 U19.14 | length 2331.9
  Top Layer w10: U19.14 1400,930 1850,1380 2010,1380 2364,1734 2574,1734 2930,2090 2930,2210 U13.12
NetU13_13: U13.13 U16.14 | length 3268.7
  Top Layer w10: U16.14 540,980 1399.95,980 1895.95,1476 2006,1476 2280,1750 2567.37,1750 2900,2082.63 2900,2280 U13.13
NetU16_9: U16.9 U16.15 | length 666.3
  Bottom Layer w10: U16.15 570,910 570,1350 U16.9
NetU18_3: U18.3 VR29.2
NetU19_9: U19.9 U19.15 | length 666.3
  Bottom Layer w10: U19.15 1260,910 1260,1350 U19.9
OE: U11.22 U12.3 | length 1617.2
  Bottom Layer w10: U12.3 2980,3700 3460,3700 4000,3160 4010,3160 U11.22
PSEN: U6.29 U12.1 | length 1471
  Bottom Layer w10: U6.29 2090,3480 2090,4062.63 2143.9,4116.53 2696.53,4116.53 U12.1
Q0: U6.6 U14.9 | length 6296.6
  Top Layer w10: U6.6 1384,3930 1570,3744 v1(1570,2700) ; v1(3970,1910) 3972.53,1907.47 4704.79,1907.47 4779.47,1982.16 4779.47,2009.47 4964,2194 5534,2194 5590,2250 5590,2430 U14.9
  Bottom Layer w10: v1(1570,2700) 1570,2547.37 1717.37,2400 2366.86,2400 2613.39,2153.47 2613.39,2050.61 2758,1906 3814,1906 3840,1880 3880,1880 3910,1910 v1(3970,1910)
Q1: U6.7 U14.7 | length 6660
  Top Layer w10: U6.7 1540,3630 v1(1540,2670) ; v1(3990,1880) 4001.47,1891.47 4818.85,1891.47 4860,1932.63 4860,1962.16 4860.53,1962.69 4860.53,2063.16 4975.37,2178 5618,2178 5690.53,2250.53 5690.53,2506.79 5690,2507.31 5690,2730 U14.7
  Bottom Layer w10: v1(1540,2670) 1540,2554.75 1710.75,2384 2360.24,2384 2597.39,2146.84 2597.39,2043.98 2751.37,1890 3807.37,1890 3833.37,1864 3886.63,1864 3902.63,1880 v1(3990,1880) v1@3993,1883
Q2: U6.8 U14.6 | length 6642.5
  Top Layer w10: U6.8 1510,3560 v1(1510,2640) ; v1(4010,1850) 4035.47,1875.47 4825.47,1875.47 4880,1930 4880,1962.16 4879.47,1962.69 4879.47,2059.47 4982,2162 5624.63,2162 5706.53,2243.9 5706.53,2646.53 U14.6
  Bottom Layer w10: v1(1510,2640) 1510,2562.12 1704.12,2368 2353.61,2368 2581.39,2140.22 2581.39,2037.35 2744.75,1874 3796,1874 3822,1848 3899.21,1848 3907.88,1856.67 4003.33,1856.67 v1(4010,1850)
RD: U1.8 U6.17 U12.2 U16.21 U19.21 | length 8016
  Top Layer w10: U6.17 v1(1440,2930) ; U12.2 2980,3800 3790,3800 3890,3700 4210,3700 4410,3500 4450,3500 4480,3470 4480,3300 U1.8
  Bottom Layer w10: U16.21 1210,450 ; U6.17 1420,2750 1420,2480 1210,2270 1210,450 ; v1(1440,2930) 1790,3280 2010,3280 2106,3376 2106,4056 2150.53,4100.53 2679.47,4100.53 U12.2 ; U19.21 1890,380 1280,380 1210,450
WR: U1.6 U6.16 U11.27 U16.18 U19.18 | length 6832.6
  Top Layer w10: U16.18 540,480 1290,480 U19.18 ; v1@2000,2880 v1(2010,2880) 2440,3310 2540,3310 2608,3378 3228,3378 3350,3500 3860,3500 U11.27 4230,3650 U1.6
  Bottom Layer w10: U19.18 1450,640 1450,2820 1393,2877 ; U6.16 1393,2877 ; v1(2010,2880) 2007,2877 1393,2877
pads on no net: J1.1 J1.RSH J1.TSH JP1.1 JP1.2 JP1.3 JP3.ID JP3.MT2 JP3.P$1 JP3.P$2 RESET.2 RESET.3 SW2.1 SW2.3 SW3.1 SW3.3 SW4.1 SW4.3 SW5.1 SW5.3 SW6.1 SW6.3 U1.9 U1.18 U1.19 U5.1 U5.2 U5.4 U5.5 U6.15 U7.1 U7.2 U7.3 U7.4 U7.5 U8.5 U8.6 U8.8 U8.9 U8.10 U8.11 U8.12 U8.13 U10.2 U10.3 U10.6 U10.8 U10.9 U10.10 U10.11 U10.12 U10.13 U10.14 U10.17 U10.19 U10.22 U10.23 U10.24 U10.27 U10.28 U11.1 U12.4 U12.5 U12.6 U12.8 U12.9 U12.10 U12.11 U12.12 U12.13 U13.7 U13.9 U13.10 U13.15 U14.2 U14.3 U14.4 U14.14 U14.15 U15.7 U15.9 U15.10 U16.11 U16.23 U16.24 U16.29 U16.30 U16.31 U16.32 U16.33 U16.34 U16.36 U16.37 U16.38 U16.39 U17.1 U17.4 U18.1 U18.5 U18.8 U19.23 U19.24 U19.29 U19.30 U19.31 U19.32 U19.33 U19.34 U19.36 U19.37 U19.38 U19.39 VR1.4 VR2.4 VR3.4 VR4.4 VR5.4 VR6.4 VR7.4 VR8.4 VR9.4 VR10.4 VR11.4 VR12.4 VR13.4 VR14.4 VR15.4 VR16.4 VR17.4 VR18.4 VR19.4 VR20.4 VR21.4 VR22.4 VR23.4 VR24.4 VR25.4 VR25.5 VR26.4 VR26.5 VR27.4 VR27.5 VR28.4 VR28.5 VR29.4 VR29.5

## Keep-outs
Keep-Out Layer:
  circle w10: c-130,2355 r374
  lines w10: -600,-100 9950,-100 9950,4930 -600,4930 -600,-100

## Silkscreen, mask and mechanical layers (free items; w line width, h text height)
Top Overlay:
  lines w20: 7380,2690 7380,2740 7440,2740 7440,2640 7500,2640 7500,2690 ; 7985,2690 8025,2740 8095,2640 8135,2690 ; 8615,2665 8615,2735 8745,2645 8745,2715 ; 9240,2640 9240,2740 ; 9280,2640 9280,2740 ; 9320,2640 9320,2740 ; 9360,2640 9360,2740
  text "Decay" at 4030,4790 h60
  text "Sustain" at 4690,4790 h60
  text "Attack" at 3320,4780 h60
  text "Release" at 5380,4780 h60
  text "~" at -520,4600 h400 r340.35
  text "SynthDude" at -200,4580 h320
  text "Raphael Chang" at 310,4440 h150
  text "Filter" at 6020,4410 h60 r90
  text "~" at 6720,2640 h300 r340.35
  text "Waveform" at 2170,80 h60 r90

## Text inside footprints (layer, text, board x,y; h text height)
SW2: Top Overlay "1" at 6831.02,2428.74 h34; Top Overlay "2" at 7177.48,2428.74 h34; Top Overlay "3" at 6831.02,2231.89 h34; Top Overlay "4" at 7177.48,2231.89 h34; Top Overlay "+" at 7053.75,2488 h73.1 r180; Top Overlay "-" at 7051.75,2283.25 h73.1 r180; Top Overlay "+" at 7084.67,2586.02 h73.1
SW3: Top Overlay "1" at 7451.02,2428.74 h34; Top Overlay "2" at 7797.48,2428.74 h34; Top Overlay "3" at 7451.02,2231.89 h34; Top Overlay "4" at 7797.48,2231.89 h34; Top Overlay "+" at 7673.75,2488 h73.1 r180; Top Overlay "-" at 7671.75,2283.25 h73.1 r180; Top Overlay "+" at 7704.67,2586.02 h73.1
SW4: Top Overlay "1" at 8071.02,2428.74 h34; Top Overlay "2" at 8417.48,2428.74 h34; Top Overlay "3" at 8071.02,2231.89 h34; Top Overlay "4" at 8417.48,2231.89 h34; Top Overlay "+" at 8293.75,2488 h73.1 r180; Top Overlay "-" at 8291.75,2283.25 h73.1 r180; Top Overlay "+" at 8324.67,2586.02 h73.1
SW5: Top Overlay "1" at 8691.02,2428.74 h34; Top Overlay "2" at 9037.48,2428.74 h34; Top Overlay "3" at 8691.02,2231.89 h34; Top Overlay "4" at 9037.48,2231.89 h34; Top Overlay "+" at 8913.75,2488 h73.1 r180; Top Overlay "-" at 8911.75,2283.25 h73.1 r180; Top Overlay "+" at 8944.67,2586.02 h73.1
SW6: Top Overlay "1" at 9311.02,2428.74 h34; Top Overlay "2" at 9657.48,2428.74 h34; Top Overlay "3" at 9311.02,2231.89 h34; Top Overlay "4" at 9657.48,2231.89 h34; Top Overlay "+" at 9533.75,2488 h73.1 r180; Top Overlay "-" at 9531.75,2283.25 h73.1 r180; Top Overlay "+" at 9564.67,2586.02 h73.1